# Allegro board ZWAVE_BOOSTERPACK.brd
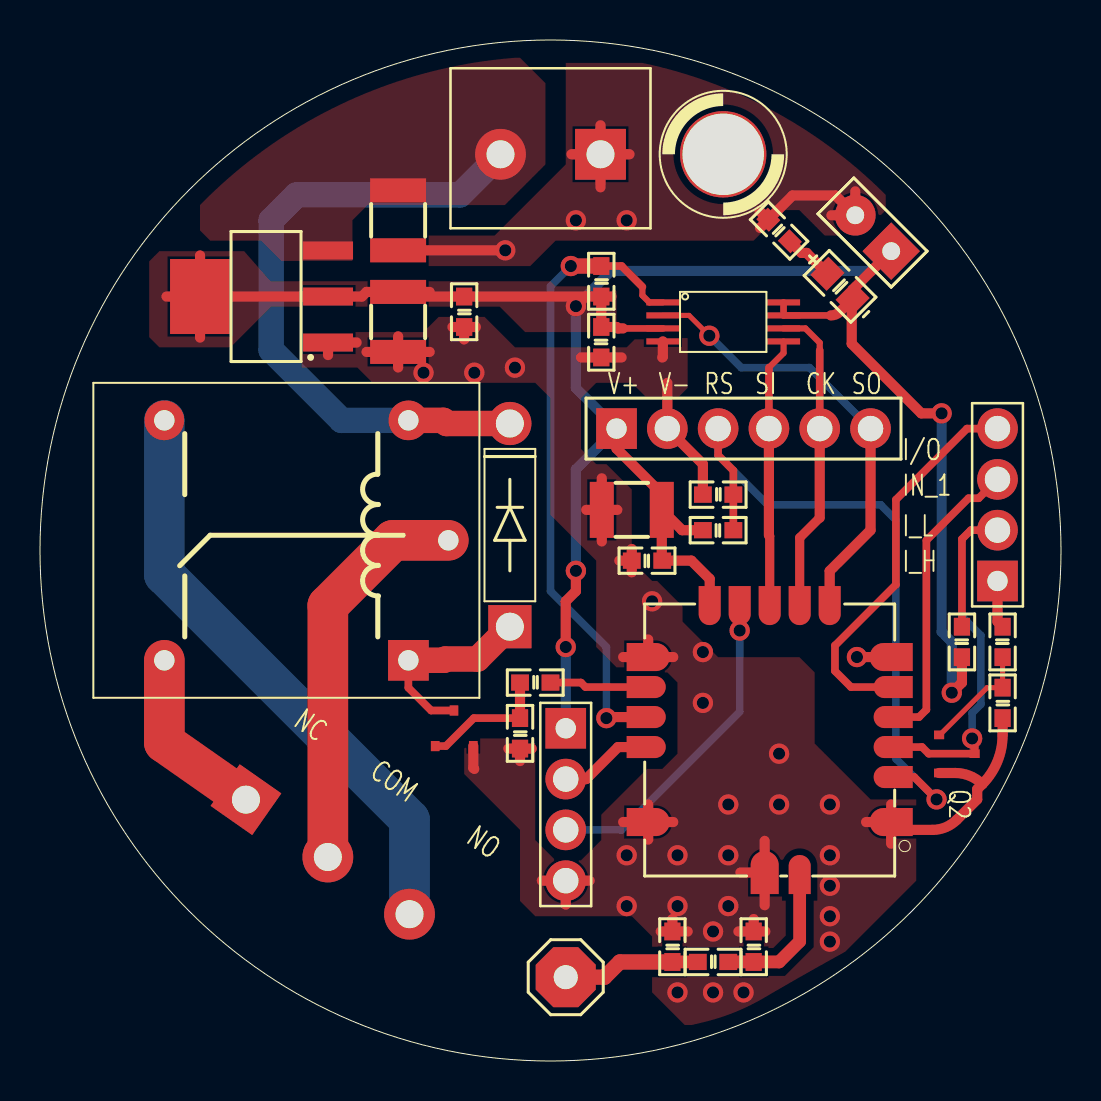
[diagram p0: board, top side]
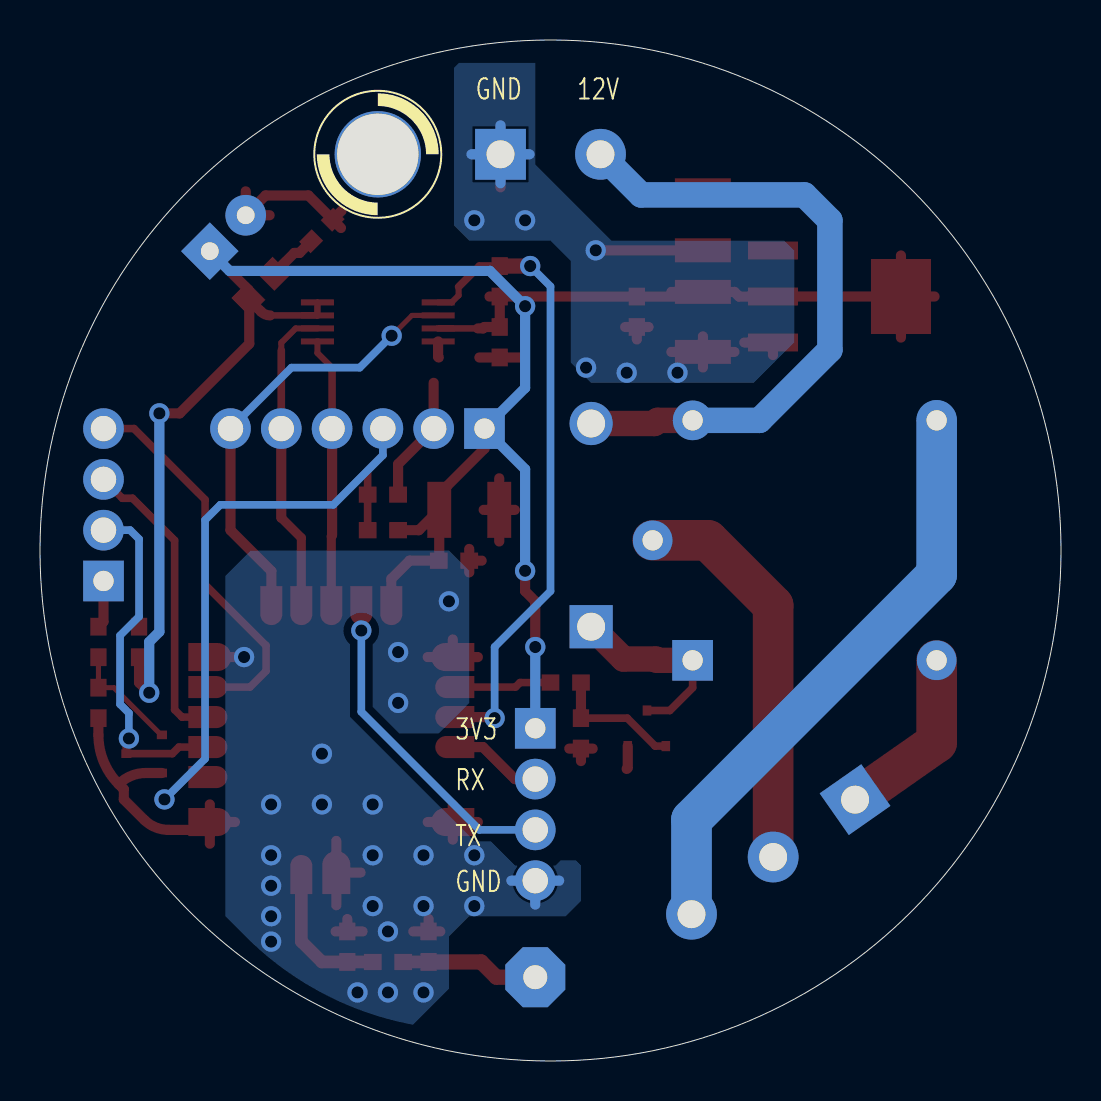
[diagram p1: board, bottom side, seen from below]

Outline 51.05 x 51.05 mm; copper layers: TOP, BOTTOM. Coordinates in mm from the lower left corner of the outline.
Outline path: circle c25.53,25.53 r25.53

## Design rules (mm)
nets with their own width: min track width 0.508; nets 3V3 12V GND

## Placement (name value [footprint] x y rotation side)
C1  104  [C0603]  21.21 37.47 90 top
C2  10uF  [CAP_1210]  17.91 42.04 270 top
C3  10uF  [CAP_1210]  17.91 36.96 270 top
C4  0.1uF  [C0603]  30.35 25.02 0 top
C5  10uF  [CAP_1210]  29.59 27.56 180 top
C6  NC  [C0603]  35.69 5.71 90 top
C7  NC  [C0603]  31.62 5.71 90 top
C8  0.1uF  [C0603]  33.91 28.32 180 top
C9  0.1uF  [C0603]  28.07 35.94 270 top
D1  LED  [LED0805]  40.01 38.73 315 top
D2  DIODE  [DIODE_DO-41]  23.5 26.8 90 top
J1  DC12V  [DOMINO2_5]  25.53 45.34 180 top
J2  HEADER 4  [HEADER4PITCH100MIL]  26.29 12.83 270 top
J3  3V3  [HEADER-2]  40.77 42.29 225 top
J4  IO  [HEADER4PITCH100MIL]  47.88 27.81 90 top
J5  HEADER 1  [HEADER_1_3MM]  26.29 4.19 0 top
J6  HEADER 3  [DOMINO3_5MM]  10.29 13.08 325 top
J7  ISP  [HEADER-6]  35.18 31.62 90 top
L1  22nH  [C0603]  33.66 4.95 180 top
LS1  RELAY SPDT  [RELAY_5PIN]  12.32 26.04 180 top
MH1  HOLE 4mm  [MH_4MM]  34.16 45.34 0 top
Q1  C1815  [SOT23]  20.7 16.64 90 top
Q2  C1815  [SOT23]  45.85 15.37 0 top
R1  1k  [R0603]  36.96 41.53 315 top
R2  10K  [R0603]  33.91 26.54 0 top
R3  10k  [R0603]  24.77 18.92 180 top
R4  10k  [R0603]  24 16.38 90 top
R5  10K  [R0603]  28.07 38.99 90 top
R6  10k  [R0603]  46.1 20.96 270 top
R7  4K7  [R0603]  48.13 20.96 270 top
R8  47K  [R0603]  48.13 17.91 90 top
U1  LM1117  [SOT-223]  11.3 38.23 0 top
U2  ZM5202  [ZM5202_D]  29.34 23.75 270 top
U3  CAT25256  [TSSOP-8]  34.16 36.96 0 top

## Library data of the parts
C1 C4 C9 = CAP NP
C2 C3 C5 = CAP: User Part Number: PartNr
C6 = C-10pF/50V-SMD0805
C7 = C-6pF/50V-SMD0805
C8 = Cap 0603
D1 = LED
D2 = DIODE
J1 J3 = HEADER 2
J2 J4 = HEADER 4
J5 = HEADER 1
J6 = HEADER 3
J7 = HEADER 6
L1 = L-8.2nH-SMD0805
LS1 = RELAY SPDT_0
MH1 = MOUNTING HOLE
Q1 Q2 = 2N1208_0
R1 R2 = Resistor 0603
R3 R4 R6-R8 = R
R5 = RES-SM0402_0
U1 = AMS1117/LM1117_1
U2 = ZM5202
U3 = CAT25C02_0

## Footprints (pads in the part's own frame, mm; a bottom-side part is the same pattern mirrored in y, then rotated)
C0603
  rect 0.889x0.813 smd: 1(-0.762,0) 2(0.762,0)
CAP_1210
  rect 1.2x2.8 smd: 1(-1.5,0) 2(1.5,0)
DIODE_DO-41
  round 2.159 hole 1.397: 1(5.08,0)
  rect 2.159x2.159 hole 1.397: 2(-5.08,0)
DOMINO2_5
  rect 2.54x2.54 hole 1.397: 1(-2.5,0)
  round 2.54 hole 1.397: 2(2.5,0)
DOMINO3_5MM
  rect 2.54x2.54 hole 1.397: 1(0.016,-0.004)
  round 2.54 hole 1.397: 2(5.016,-0.004) 3(10.001,-0.004)
HEADER4PITCH100MIL
  rect 2.032x2.032 hole 1.016: 1(-3.81,0)
  round 2.032 hole 1.27: 2(-1.27,0) 3(1.27,0) 4(3.81,0)
HEADER-2
  rect 2.032x2.032 hole 0.889: 1(0,2.54)
  round 2.032 hole 0.889: 2(0,0)
HEADER-6
  rect 2.032x2.032 hole 1.016: 1(0,6.35)
  round 2.032 hole 1.27: 2(0,3.81) 3(0,1.27) 4(0,-1.27) 5(0,-3.81) 6(0,-6.35)
HEADER_1_3MM
  rrect 3x3 hole 1.2: 1(0,0)
LED0805
  rect 1.143x1.27 smd: 1(-0.889,0) 2(0.889,0)
MH_4MM
  round 4.318 hole 4.064 unplated: (0,0)
R0603
  rect 0.889x0.813 smd: 1(-0.762,0) 2(0.762,0)
RELAY_5PIN
  rect 2.032x2.032 hole 1.016: 1(-6.101,6)
  round 1.981 hole 1.016: 2(-6.101,-6) 3(-8.1,0) 4(6.101,-6) 5(6.101,6)
SOT23
  rect 0.508x0.432 smd: 1(-0.889,0.94) 2(-0.889,-0.965) 3(0.889,0)
SOT-223
  rect 2.5x0.9 smd: 1(3.1,-2.3) 2(3.1,0) 3(3.1,2.3)
  rect 3x3.75 smd: 4(-3.3,0)
TSSOP-8
  rect 1.651x0.305 smd: 1(-3.017,0.975) 2(-3.017,0.325) 3(-3.017,-0.325) 4(-3.017,-0.975) 5(3.017,-0.975) 6(3.017,-0.325) 7(3.017,0.325) 8(3.017,0.975)
ZM5202_D
  custom 1.402x2.15 smd: 1(11.8,13.225) 6(3.55,13.225) 12(3.55,1.075) 16(11.8,1.075)
  custom 1.102x1.952 smd: 2(9.55,13.325) 3(8.05,13.325) 4(6.55,13.325) 5(5.05,13.325) 13(5.05,0.975) 14(6.55,0.975) 15(8.05,0.975)
  custom 1.952x1.102 smd: 7(0.975,10.15) 8(0.975,8.65) 9(0.975,7.15) 10(0.975,5.65) 11(0.975,4.15) 18(14.425,8.65)
  custom 2.15x1.402 smd: 17(14.325,6.9)

## Nets
3V3: C1.2 C3.1 C4.2 C5.1 C9.1 D1.2(ANODE) J2.1 J3.1 J7.1 R2.1 R5.1 R6.2 U1.2(VO) U1.4(PAD) U2.11(VDD) U3.3(W\P\) U3.7(H\O\L\D\) U3.8(VCC)
12V: C2.1 D2.1(K) J1.2 LS1.2(COIL1) U1.3(VI)
GND: C1.1 C2.2 C3.2 C4.1 C5.2 C6.2 C7.2 C8.2 C9.2 J1.1 J2.4 J3.2 J7.2 Q1.2(E) Q2.2(E) R1.1 R4.1 R8.1 U1.1(GND) U2.1(GND#1) U2.6(GND#6) U2.12(GND#12) U2.16(GND#16) U2.17(GND#17) U3.4(GND)
ANTEN: C7.1 J5.1 L1.2
COM: J6.2 LS1.3(COMMON)
N_C: J6.1 LS1.5(NC)
N_O: J6.3 LS1.4(NO)
RF: C6.1 L1.1 U2.18(RF)
UART_RX: J2.2 U2.15(UART_TX)
UART_TX: J2.3 U2.10(UART_RX)
ZWARE_INPUT: J4.4 U2.5(PWM_LED0)
ZWARE_RELAY: R3.1 U2.13(TRIAC)
ZWAVE_INT0: J4.2 Q2.3(C) R6.1 U2.3(INT0)
ZWAVE_INT0_HIGH: J4.1 R7.1
ZWAVE_INT1: J4.3 U2.4(INT1)
ZWAVE_RESETN: C8.1 J7.3 R2.2 U2.2(RESET_N)
ZWAVE_SPI_CS: R5.2 U2.14(ZEROX) U3.1(C\S\)
ZWAVE_SPI_MISO: J7.6 U2.7(SPI_MISO) U3.2(SO)
ZWAVE_SPI_MOSI: J7.4 U2.9(SPI_MOSI) U3.5(SI)
ZWAVE_SPI_SCLK: J7.5 U2.8(SPI_SCK) U3.6(SCLK)
N7865619: D2.2(A) LS1.1(COIL2) Q1.3(C)
N7882459: Q2.1(B) R7.2 R8.2
N18513660: Q1.1(B) R3.2 R4.2
N78684351: D1.1(CATHODE) R1.2

## Via types
v1: diameter 1.016, hole 0.61, TOP to BOTTOM, 39 vias

## Routing (per net, layer and track width the routed paths; a pad name or vN(x,y) marks a point on that pad's centre or on a via; arc(x,y) is an arc through that point)
3V3: length 119.4
  TOP w0.33: U3.8 U3.7 39.55,37.28 ; 29.15,36.63 U3.3
  TOP w0.508: C5.1 32.11,26.54 R2.1 ; C5.1 31.09,25.04 C4.2 32.57,25.02 33.49,24.1 U2.11 ; C5.1 31.09,28.36 28.83,30.62 J7.1 ; R6.2 46.1,18.92 v1(45.59,18.41) ; R5.1 27.28,38.23 ; R5.1 28.58,38.23 ; R5.1 C9.1 28.83,36.7 28.9,36.63 29.15,36.63 ; 27.28,38.23 C1.2 18.14,38.23 C3.1 ; 27.28,38.23 v1(26.8,37.74) ; C3.1 16.33,38.46 16.1,38.23 U1.2 U1.4 ; C3.1 19.48,38.46 ; 6.33,38.23 U1.4 ; U1.4 8,40.28 ; U1.4 8,36.17 ; 40.59,38.06 D1.2 40.63,38.57 J3.1 ; 40.59,38.06 40.59,35.87 44.07,32.38 v1(45.09,32.38) ; 40.59,38.06 39.99,37.47 arc(39.79,37.33) 39.55,37.28 ; v1(26.29,20.7) 26.29,22.99 26.8,23.5 v1(26.8,24.51)
  BOTTOM w0.508: v1(45.59,18.41) 45.59,20.96 45.09,21.46 v1(45.09,32.38) ; J3.1 41.58,39.51 28.56,39.51 v1(26.8,37.74) 26.8,33.66 J7.1 26.8,29.59 v1(26.8,24.51) ; v1(26.29,20.7) J2.1
12V: length 32.8
  TOP w1.27: LS1.2 20.17,32.03 20.33,31.88 D2.1
  BOTTOM w1.27: J1.2 21,43.31 12.83,43.31 11.56,42.04 11.56,35.55 15.08,32.03 LS1.2
GND: length 93.1
  TOP w0.508: 42.56,10.87 42.56,11.95 U2.1 ; 16.33,35.46 C3.2 ; C3.2 17.91,36.23 ; C3.2 17.91,34.68 ; C3.2 19.48,35.46 ; J3.2 39.78,43.28 37.63,43.28 R1.1 ; J3.2 39.57,42.29 ; J3.2 40.77,43.48 ; C2.2 v1(23.26,40.54) ; U2.1 42.56,11.94 42.94,11.56 44.63,11.56 arc(45.28,11.69) 45.84,12.06 46.86,13.08 46.86,13.59 47.12,13.84 ; U2.1 42.56,12.83 ; U2.1 41.31,11.95 ; 28.09,25.98 C5.2 ; C5.2 27.31,27.56 ; C5.2 28.87,27.56 ; C5.2 28.09,29.14 ; C9.2 28.07,35.14 ; C9.2 27.05,35.18 ; C9.2 29.08,35.18 ; R4.1 24.59,15.62 ; R4.1 24,15 ; R4.1 23.42,15.62 ; 20.62,36.7 C1.1 ; C1.1 21.79,36.7 ; C1.1 21.21,36.08 ; J1.1 28.03,46.79 ; J1.1 26.58,45.34 ; J1.1 29.47,45.34 ; J1.1 28.03,43.69 ; C7.2 32.38,6.48 ; C7.2 31.04,6.48 ; C7.2 31.62,7.1 ; 47.12,13.84 arc(47.87,14.97) 48.13,16.3 R8.1 ; 47.12,13.84 arc(46.5,14.26) 45.77,14.4 Q2.2 ; U2.17 36.24,9.43 35.02,9.43 ; U2.17 36.24,7.79 ; U2.17 36.24,11.01 ; 31.37,33.91 J7.2 33.15,29.84 C8.2 ; 25.1,9.02 J2.4 ; J2.4 27.48,9.02 ; J2.4 26.29,7.82 ; U2.12 30.41,20.2 ; U2.12 31.67,20.2 ; U2.12 29.16,20.2 ; U2.12 30.41,21.08 ; R1.1 35.98,42.51 ; R1.1 36.01,41.65 ; 29.59,24.43 C4.1 ; C4.1 29.59,25.6 ; C4.1 28.97,25.02 ; 31.12,35.18 31.15,35.21 U3.4 ; Q1.2 21.67,14.66 21.72,14.61 ; U2.6 v1(40.85,20.2) ; 15.83,35.93 U1.1 14.4,35.3 ; U2.16 31.67,11.95 ; U2.16 30.41,11.95 ; U2.16 30.41,12.83 ; U2.16 29.16,11.95 ; U2.16 30.41,11.07 ; C6.2 35.69,7.1 ; C6.2 34.92,6.48 ; C6.2 36.27,6.48
  BOTTOM w0.508: J1.1 29.47,45.34 ; J1.1 26.58,45.34 ; J1.1 28.03,46.79 ; J1.1 28.03,43.89 ; J2.4 27.48,9.02 ; J2.4 26.29,7.82 ; J2.4 25.1,9.02
  vias: v1(19.18,34.42) v1(21.72,34.42) v1(23.75,34.67) v1(26.8,42.04) v1(29.34,42.04) v1(29.34,10.29) v1(29.34,7.75) v1(30.61,22.99) v1(31.88,10.29) v1(31.88,7.75) v1(31.88,3.43) v1(33.15,20.45) v1(33.15,17.91) v1(33.66,6.48) v1(33.66,3.43) v1(34.42,12.83) v1(34.42,10.29) v1(34.42,7.75) v1(35.18,3.43) v1(36.96,15.37) v1(36.96,12.83) v1(39.5,12.83) v1(39.5,10.29) v1(39.5,8.76) v1(39.5,7.24) v1(39.5,5.97)
ANTEN: length 6.9
  TOP w0.635: L1.2 C7.1
  TOP w0.762: C7.1 29,4.95 28.23,4.19 J5.1
COM: length 20
  TOP w2.032: LS1.3 17.65,26.04 14.39,22.78 J6.2
N_C: length 9.1
  TOP w2.032: LS1.5 6.22,15.93 J6.1
N_O: length 29.8
  BOTTOM w2.032: J6.3 18.48,12.07 6.22,24.32 LS1.4
RF: length 7.3
  TOP w0.635: U2.18 37.99,5.98 36.96,4.95 C6.1 L1.1
UART_RX: length 4.7
  TOP w0.508: J2.2 27.3,14.1 28.91,15.7 U2.15
UART_TX: length 16.5
  TOP w0.381: U2.10 v1(34.99,21.53)
  BOTTOM w0.381: v1(34.99,21.53) 34.99,17.46 29.08,11.56 J2.3
ZWARE_INPUT: length 19.6
  TOP w0.381: J4.4 46.36,31.62 42.8,28.07 42.8,23.82 39.75,20.77 39.75,19.5 40.55,18.7 U2.5
ZWARE_RELAY: length 4.9
  TOP w0.381: U2.13 27.28,18.7 27.05,18.92 R3.1
ZWAVE_INT0: length 23.9
  TOP w0.381: J4.2 46.55,26.54 46.1,26.1 R6.1 ; U2.3 44.11,15.7 44.44,15.37 Q2.3 46.74,15.68 46.61,15.81 v1(46.61,16.13)
  BOTTOM w0.381: J4.2 46.55,26.54 46.1,26.1 46.1,22.23 47.05,21.28 47.05,17.84 46.61,17.4 v1(46.61,16.13)
ZWAVE_INT0_HIGH: length 2.4
  TOP w0.508: R7.1 47.88,21.97 J4.1
ZWAVE_INT1: length 15.1
  TOP w0.381: U2.4 43.95,17.2 44.32,17.57 44.32,26.04 46.43,28.14 46.94,28.14 J4.3
ZWAVE_RESETN: length 34.4
  TOP w0.381: U2.2 43.71,14.2 v1(44.83,13.08) ; J7.3 33.91,30.29 34.67,29.53 C8.1 R2.2
  BOTTOM w0.381: J7.3 33.91,30.29 36.39,27.81 42.04,27.81 42.8,27.05 42.8,15.11 v1(44.83,13.08)
ZWAVE_SPI_CS: length 31.8
  TOP w0.305: U3.1 30.47,37.93 30.12,38.28 30.12,38.71
  TOP w0.381: 30.12,38.71 29.08,39.75 R5.2
  TOP w0.508: v1(28.32,17.15) 28.38,17.2 U2.14
  TOP w0.762: R5.2 v1(26.54,39.75)
  BOTTOM w0.381: v1(28.32,17.15) 28.32,20.7 25.53,23.5 25.53,38.73 v1(26.54,39.75)
ZWAVE_SPI_MISO: length 22.4
  TOP w0.254: v1(33.47,36.27) 32.45,37.28 U3.2
  TOP w0.508: J7.6 41.53,26.54 39.49,24.5 U2.7
  BOTTOM w0.381: v1(33.47,36.27) 35.06,34.67 38.48,34.67 J7.6
ZWAVE_SPI_MOSI: length 13.5
  TOP w0.305: 36.45,34.67 37.18,35.4 U3.5
  TOP w0.381: 36.45,34.67 J7.4
  TOP w0.457: U2.9 36.49,26.25 36.45,26.29
  TOP w0.508: 36.45,26.29 J7.4
ZWAVE_SPI_SCLK: length 15.7
  TOP w0.305: 38.99,35.53 38.99,35.92 38.27,36.63 U3.6
  TOP w0.381: J7.5 38.99,35.53
  TOP w0.457: U2.8 37.99,26.16 38.99,27.16
  TOP w0.508: 38.99,27.16 J7.5
N7865619: length 9.9
  TOP w0.381: LS1.1 18.42,18.66 19.56,17.53 20.7,17.53
  TOP w1.27: D2.2 21.88,20.1 20.26,20.1 20.2,20.04 LS1.1
N7882459: length 5.7
  TOP w0.254: R7.2 R8.2 47.36,18.67 45,16.31 Q2.1
N18513660: length 6.6
  TOP w0.381: Q1.1 20.29,15.75 21.69,17.15 R4.2
  TOP w0.508: R3.2 R4.2
N78684351: length 2.6
  TOP w0.508: D1.1 38.33,40.41 38.08,40.41 R1.2

## Copper pours and planes (outline as drawn; the poured copper is in the pictures)
3V3 on TOP: 10.21,40.5 11.53,38.99 25.53,38.99 25.78,38.73 28.58,38.73 28.83,38.48 28.83,36.7 28.58,36.45 24.26,36.45 22.99,37.72 11.56,37.72 9.53,35.69 5.97,35.69 5.46,36.2 5.46,39.99 5.97,40.5
12V on TOP: 23.75,50.17 15.2,47.92 8,42.8 8,41.53 8.51,41.02 11.05,41.02 12.07,40.01 15.62,40.01 15.62,42.04 16.38,42.8 23.24,42.8 25.27,44.83 25.27,48.89 24,50.17
GND on TOP: 21.21,15.62 21.72,16.13 24.51,16.13 24.77,15.88 24.77,11.05 25.78,10.03 27.05,10.03 28.07,11.05 28.07,12.32 30.35,14.61 31.12,14.61 31.88,15.37 31.88,18.92 31.37,19.43 29.34,19.43 29.34,19.69 28.83,19.69 27.81,20.7 27.81,25.02 25.53,27.3 25.53,33.15 24.77,33.91 16.64,33.91 15.88,34.67 13.08,34.67 13.08,36.45 19.18,36.45 19.94,37.21 22.23,37.21 23.75,35.69 29.34,35.69 29.84,36.2 32.38,36.2 32.38,33.66 31.88,33.15 30.35,33.15 29.59,33.91 27.81,33.91 27.05,33.15 27.05,30.61 27.81,29.84 28.32,29.84 29.59,28.58 29.59,25.02 30.61,24 30.86,24 32.13,22.73 32.13,21.97 33.91,20.19 37.97,20.19 38.73,19.43 38.73,15.88 41.53,13.08 43.81,13.08 43.81,9.02 40.26,5.46 38.22,4.32 36.2,3.16 34.72,2.43 33.14,1.93 32.87,1.87 32.6,1.8 32.24,1.8 30.61,3.43 30.61,6.22 29.59,7.24 24.77,7.24 24,8 24,11.56 21.21,14.35
GND on TOP: 16.38,39.75 16.38,41.27 22.73,41.27 26.29,44.83 26.29,49.91 30.1,49.91 36.68,47.5 42.29,43.31 42.29,42.55 41.02,41.27 39.24,41.27 37.97,42.55 37.21,42.55 35.69,41.02 25.78,41.02 24.51,39.75
GND on BOTTOM: 26.29,49.91 26.29,44.83 22.48,41.02 13.84,41.02 13.34,40.51 13.34,35.94 15.37,33.91 23.5,33.91 24.51,34.92 24.51,40.01 25.53,41.02 29.59,41.02 30.35,41.78 30.35,49.66 30.1,49.91
GND on BOTTOM: 40.51,25.53 41.78,24.26 41.78,7.24 40.77,6.22 36.92,3.39 32.4,1.82 30.61,3.61 30.61,6.22 29.59,7.24 24.77,7.24 24,8 24,9.78 24.26,10.03 25.02,10.03 25.27,9.78 27.3,9.78 28.58,11.05 28.58,11.56 33.15,16.13 33.15,16.38 31.12,16.38 29.59,17.91 29.59,24.51 30.61,25.53

## Text on the board
Ref Des/Silkscreen Bottom: 12V | GND | 3V3 | RX | TX
Ref Des/Silkscreen Top: V+ | V- | RS | SI | CK | SO | I/O | IN_1 | I_L | I_H | NC | COM | NO
